# EAGLE board MicroMod_CAN-Bus_Function_Board-Panel (EAGLE 9.6.2), part 1 of 2
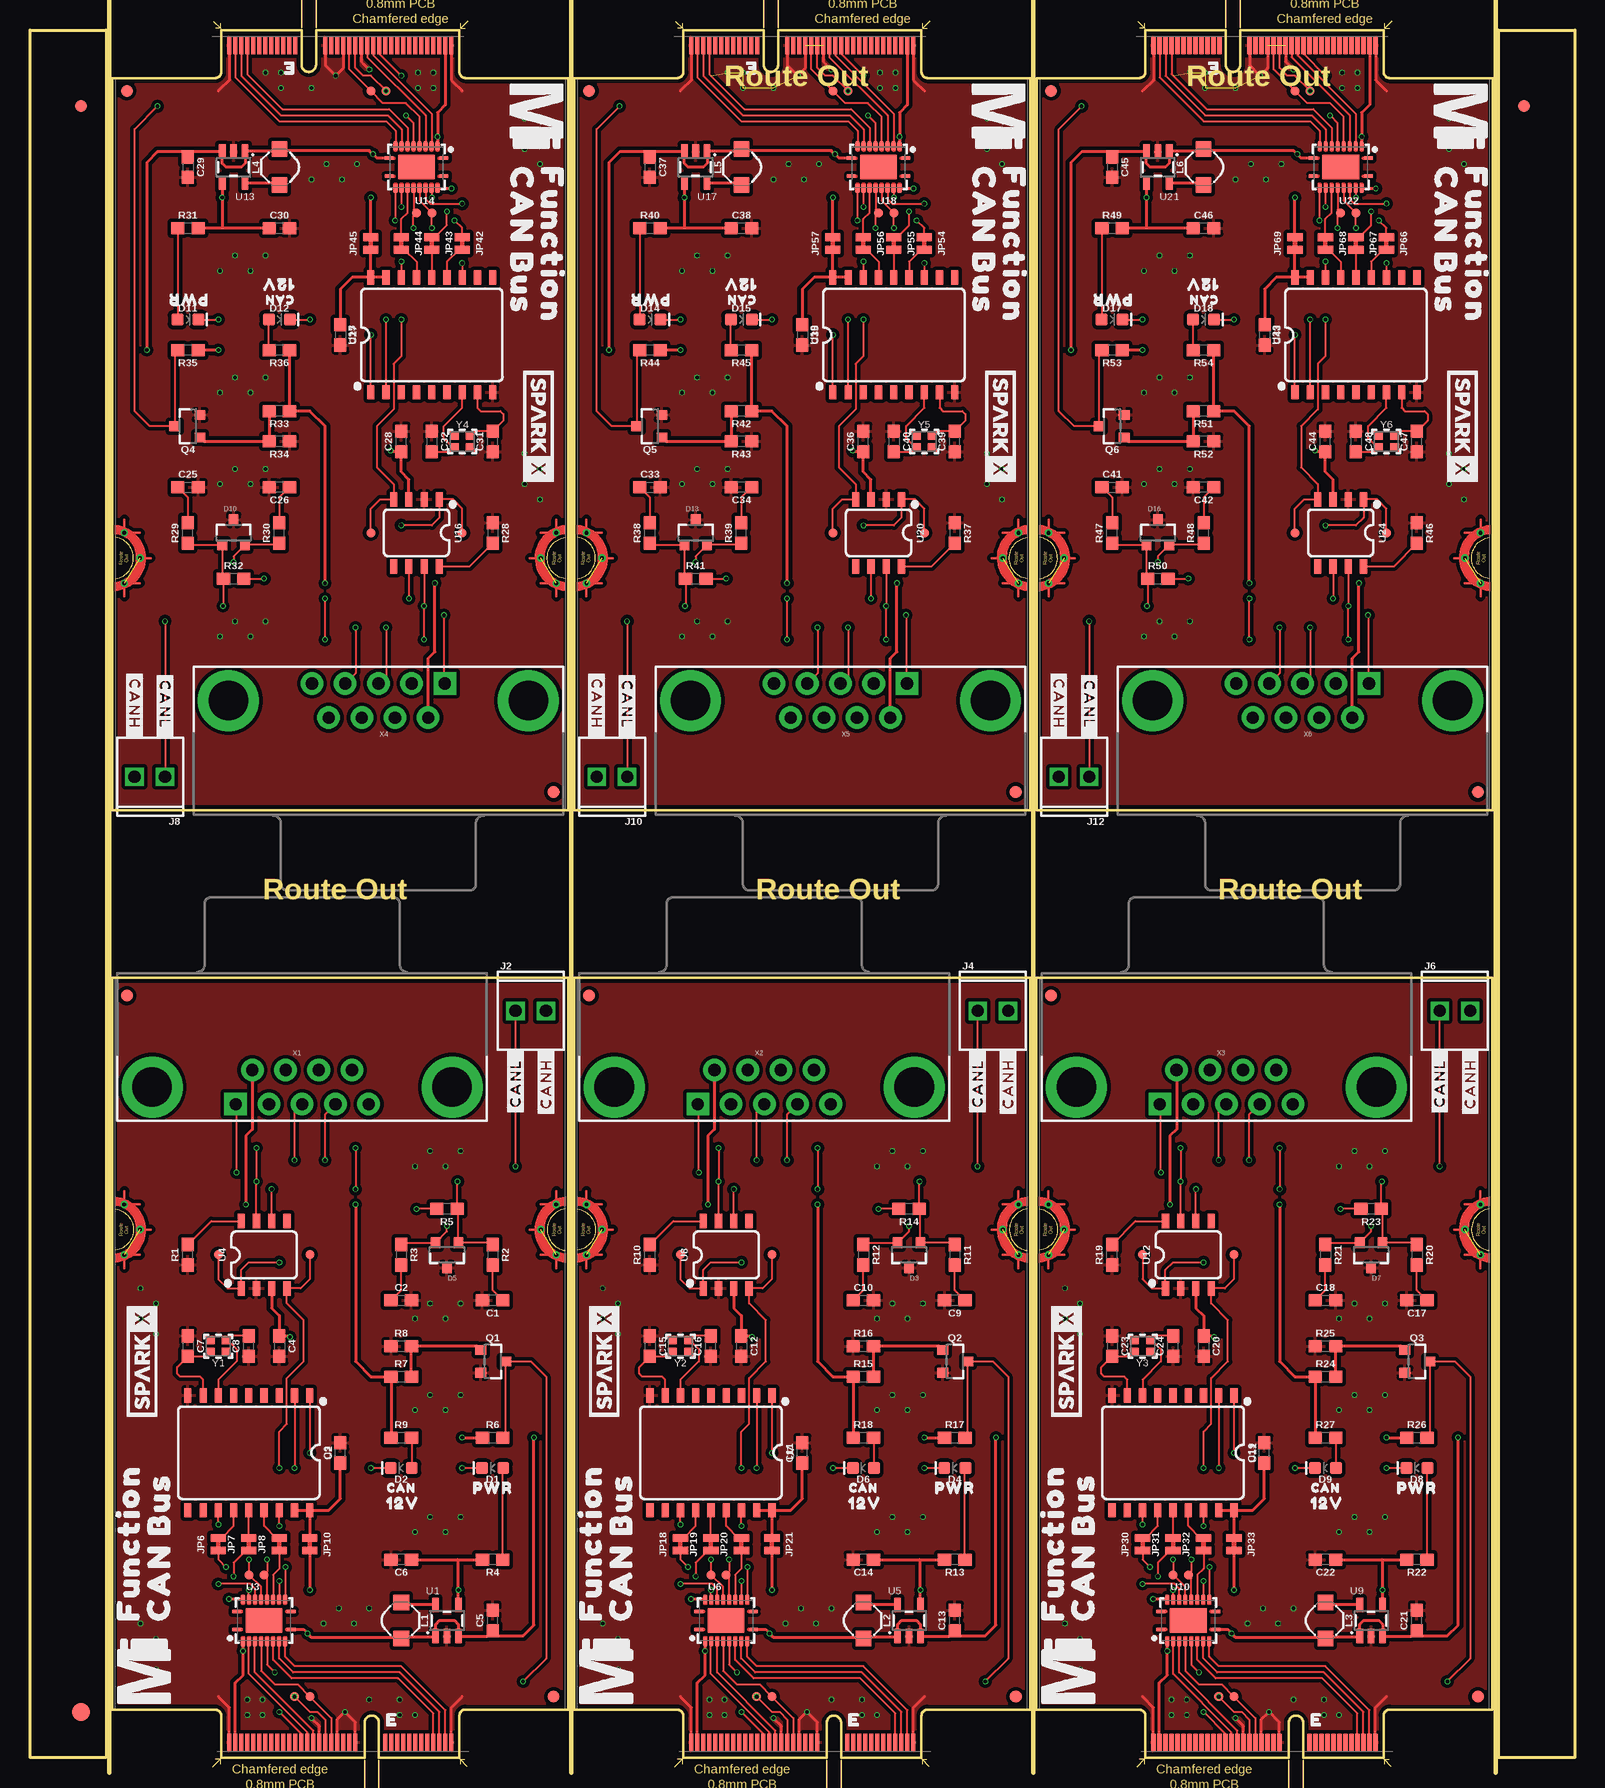
[diagram p0: board, top side]
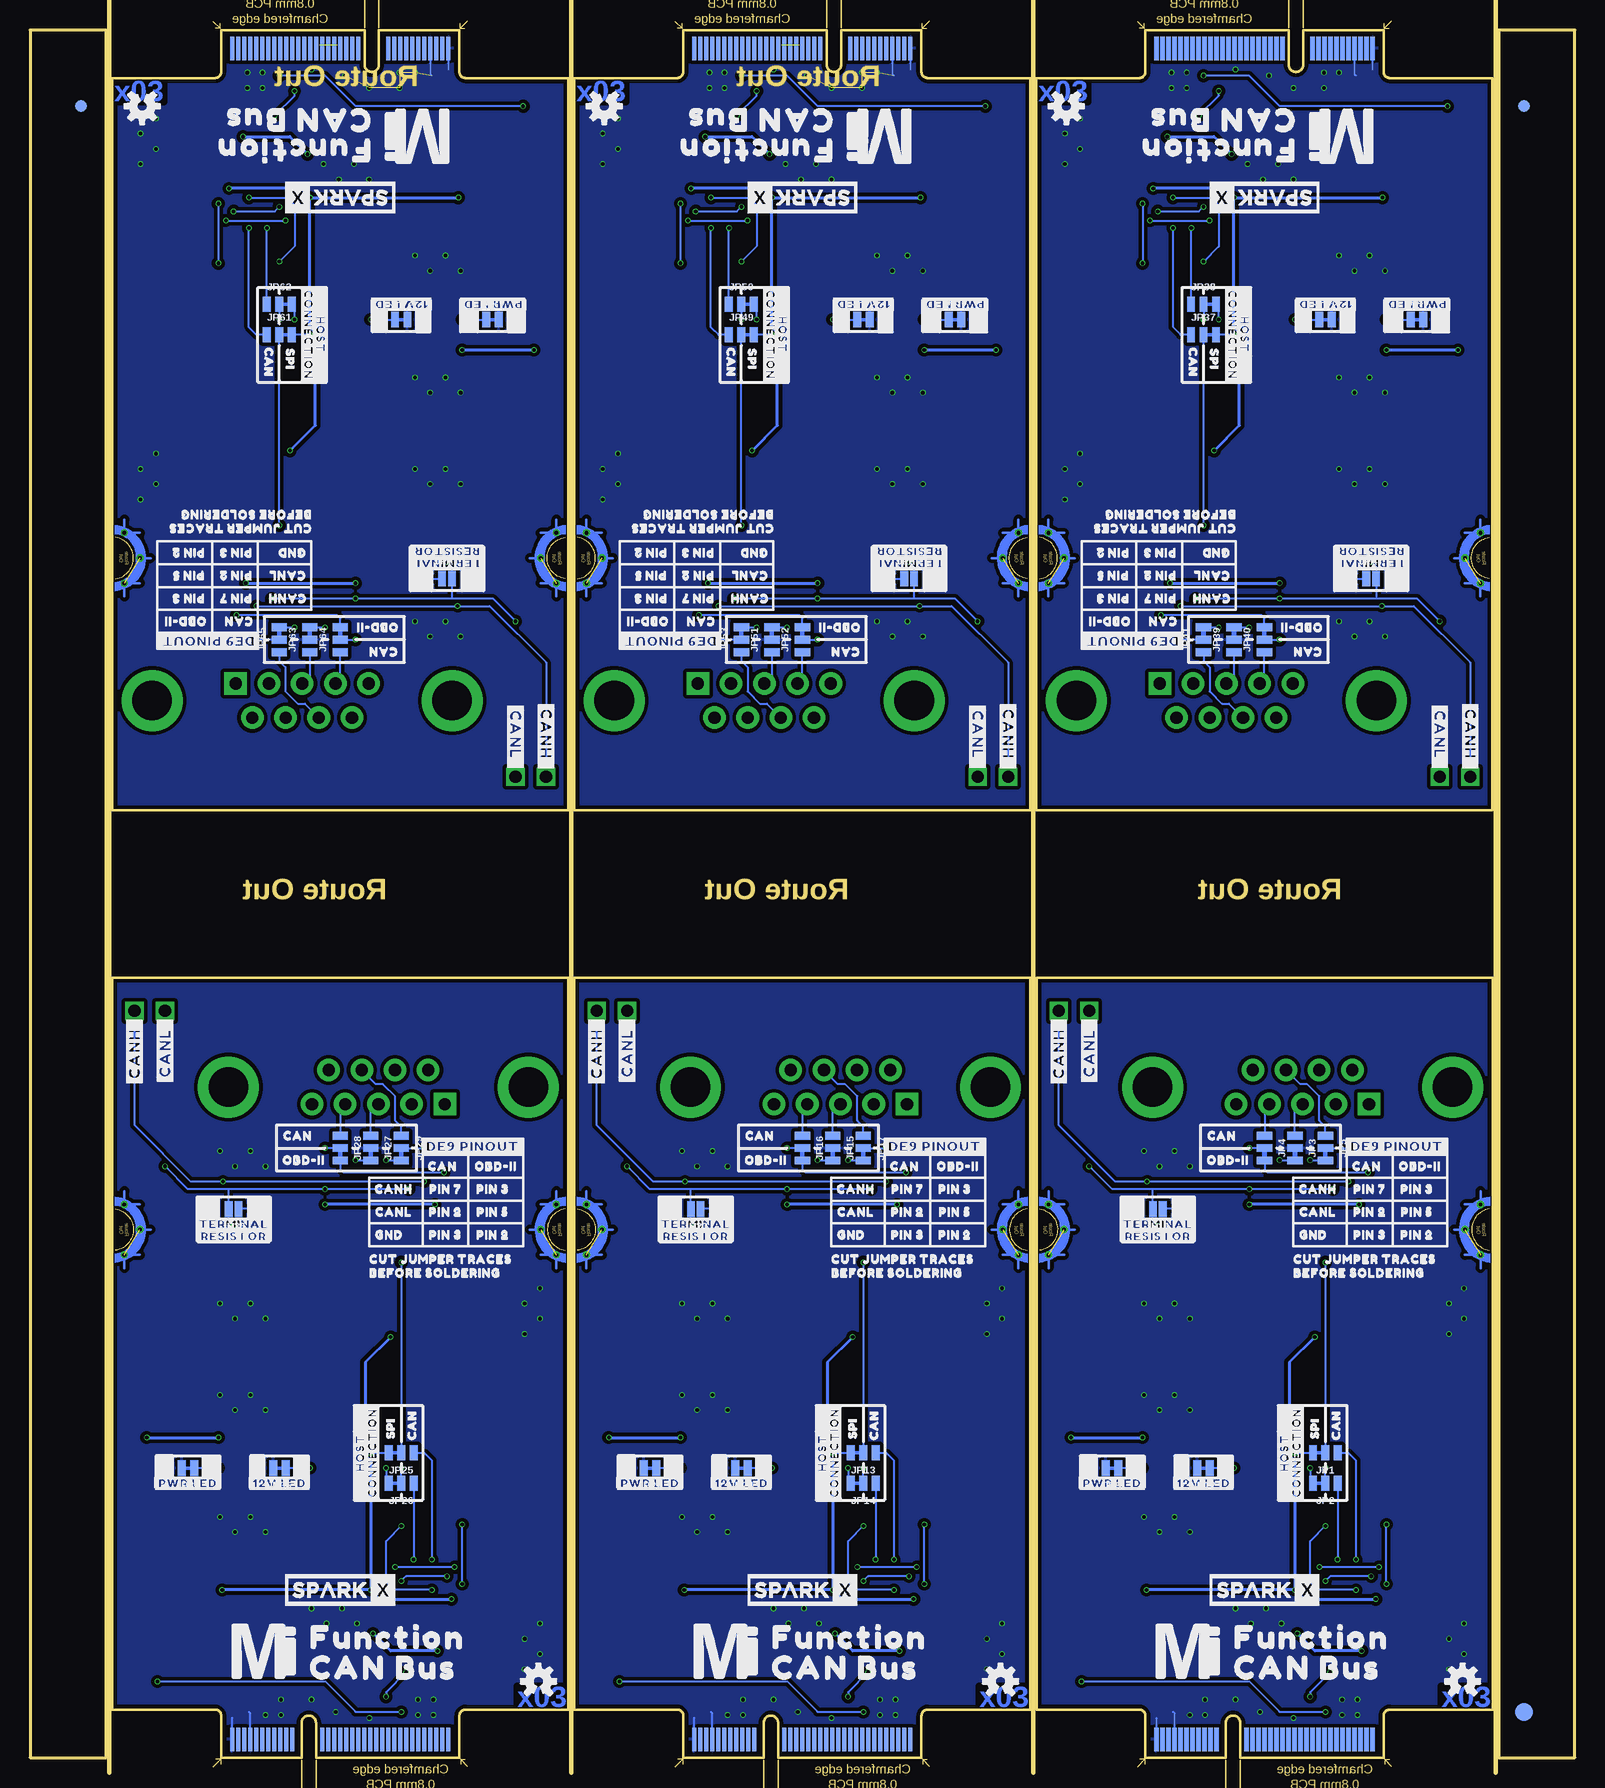
[diagram p1: board, bottom side, seen from below]

Size 128.73 x 143.97 mm. Coordinates in mm from the lower left corner, seen from the top.
Outline: 35.78,0 29.08,0 29.08,2.9 arc180 27.88,2.9 27.88,0 15.93,0 15.93,3.5 arc84 15.46,4 6.86,4 6.86,65 44.86,65 44.86,4 36.26,4 arc85 35.78,3.5 35.78,0
Outline: 74.29,0 67.59,0 67.59,2.9 arc180 66.39,2.9 66.39,0 54.44,0 54.44,3.5 arc84 53.97,4 45.37,4 45.37,65 83.37,65 83.37,4 74.77,4 arc85 74.29,3.5 74.29,0
Outline: 112.8,0 106.1,0 106.1,2.9 arc180 104.9,2.9 104.9,0 92.95,0 92.95,3.5 arc84 92.47,4 83.87,4 83.87,65 121.87,65 121.87,4 113.27,4 arc85 112.8,3.5 112.8,0
Outline: 15.93,143.97 22.63,143.97 22.63,141.07 arc180 23.84,141.07 23.84,143.97 35.78,143.97 35.78,140.47 arc84 36.26,139.97 44.86,139.97 44.86,78.97 6.86,78.97 6.86,139.97 15.46,139.97 arc85 15.93,140.47 15.93,143.97
Outline: 54.44,143.97 61.14,143.97 61.14,141.07 arc180 62.34,141.07 62.34,143.97 74.29,143.97 74.29,140.47 arc84 74.77,139.97 83.37,139.97 83.37,78.97 45.37,78.97 45.37,139.97 53.97,139.97 arc85 54.44,140.47 54.44,143.97
Outline: 92.95,143.97 99.65,143.97 99.65,141.07 arc180 100.85,141.07 100.85,143.97 112.8,143.97 112.8,140.47 arc84 113.28,139.97 121.88,139.97 121.88,78.97 83.88,78.97 83.88,139.97 92.48,139.97 arc85 92.95,140.47 92.95,143.97
Outline: 122.38,143.97 128.73,143.97 128.73,0 122.38,0 122.38,143.97
Outline: 0,143.97 6.35,143.97 6.35,0 0,0 0,143.97
Copper layers (1+2*15+16): Top 0.035mm / dielectric 1.5mm / Route2 0.035mm / dielectric 0.15mm / Route15 0.035mm / dielectric 0.2mm / Bottom 0.035mm
Design rules "MicroMod_CAN-Bus_Function_Board": minimum track width 4mil, minimum drill 0.2mm, track to track 4mil, track to pad 4mil, pad to pad 4mil, via to via 4mil, smd to smd 4mil, copper to edge 6mil, drill to drill 6mil, minimum pad ring 3mil, minimum via ring 3mil, stop-mask expansion 4mil, vias tented up to drill 25mil, thermal gap 10mil
Net classes: 0 default: width 0 mm, drill 0 mm
Milling: 4 lines

## Footprints (pad centres in the part's own frame; a part is rotated, then mirrored left to right if it is on the bottom)
0603 = smd 1.1 x 1: 1 -0.85,0; 2 0.85,0
LED-0603 = smd 1 x 1: A -0.877,0; C 0.877,0
SOT23-3 = smd 0.8 x 0.9: 1 -0.95,-1; 2 0.95,-1; 3 0,1.1
FIDUCIAL-1X2 = smd 1 x 1: 1 0,0
FIDUCIAL-1.5X3 = smd 1.5 x 1.5: 1 0,0
FIDUCIAL-0.2MM = smd 0.2 x 0.2: 1 0,0
M.2-CARD-E-22_FUNCTION_STANDARD = smd 0.35 x 1.45: 1 9.25,1.275; 3 8.75,1.275; 5 8.25,1.275; 7 7.75,1.275; 9 7.25,1.275; 11 6.75,1.275; 13 6.25,1.275; 15 5.75,1.275; 17 5.25,1.275; 19 4.75,1.275; 21 4.25,1.275; 23 3.75,1.275; 33 1.25,1.275; 35 0.75,1.275; 37 0.25,1.275; 39 -0.25,1.275; 41 -0.75,1.275; 43 -1.25,1.275; 45 -1.75,1.275; 47 -2.25,1.275; 49 -2.75,1.275; 51 -3.25,1.275; 53 -3.75,1.275; 55 -4.25,1.275; 57 -4.75,1.275; 59 -5.25,1.275; 61 -5.75,1.275; 63 -6.25,1.275; 65 -6.75,1.275; 67 -7.25,1.275; 69 -7.75,1.275; 71 -8.25,1.275; 73 -8.75,1.275; 75 -9.25,1.275 | smd 0.35 x 1.95 bottom: 2 9,1.525; 4 8.5,1.525; 6 8,1.525; 8 7.5,1.525; 10 7,1.525; 12 6.5,1.525; 14 6,1.525; 16 5.5,1.525; 18 5,1.525; 20 4.5,1.525; 22 4,1.525; 32 1.5,1.525; 34 1,1.525; 36 0.5,1.525; 38 0,1.525; 40 -0.5,1.525; 42 -1,1.525; 44 -1.5,1.525; 46 -2,1.525; 48 -2.5,1.525; 50 -3,1.525; 52 -3.5,1.525; 54 -4,1.525; 56 -4.5,1.525; 58 -5,1.525; 60 -5.5,1.525; 62 -6,1.525; 64 -6.5,1.525; 66 -7,1.525; 68 -7.5,1.525; 70 -8,1.525; 72 -8.5,1.525; 74 -9,1.525 | drill 0.305 pad 0.61: GND1 -18,41.9; GND2 -16.7,44; GND3 -18,46.1; GND4 18,41.9; GND5 16.7,44; GND6 18,46.1
1X02_2.54_SCREWTERM = drill 1.016 square: P1 2.54,0; P2 0,0
SMT-JUMPER_3_1-NC_TRACE_NO-SILK = smd 0.66 x 1.27: 1 -1.041,0; 2 0,0; 3 1.041,0
SMT-JUMPER_2_NC_TRACE_NO-SILK = smd 0.66 x 1.27: 1 -0.521,0; 2 0.521,0
SMT-JUMPER_2_NO_NO-SILK = smd 0.635 x 1.27: 1 -0.406,0; 2 0.406,0
INDUCTOR_4.7UH = smd 1.3 x 1.3: P$1 -1.5,0; P$2 1.5,0
PAD.03X.03 = smd 0.762 x 0.762: 1 0,0
SOT23-5 = smd 0.55 x 1.2: 1 -0.95,-1.3; 2 0,-1.3; 3 0.95,-1.3; 4 0.95,1.3; 5 -0.95,1.3
SO18W = smd 0.6 x 1.2: 1 -5.08,-4.788; 2 -3.81,-4.788; 3 -2.54,-4.788; 4 -1.27,-4.788; 5 0,-4.788; 6 1.27,-4.788; 7 2.54,-4.788; 8 3.81,-4.788; 9 5.08,-4.788; 10 5.08,4.788; 11 3.81,4.788; 12 2.54,4.788; 13 1.27,4.788; 14 0,4.788; 15 -1.27,4.788; 16 -2.54,4.788; 17 -3.81,4.788; 18 -5.08,4.788
VFQFN-20 = smd 0.7 x 0.28: 1 -2.3,-0.75; 10 2.3,-0.75; 11 2.3,0.75; 20 -2.3,0.75 | smd 0.28 x 0.7: 2 -1.75,-1.8; 3 -1.25,-1.8; 4 -0.75,-1.8; 5 -0.25,-1.8; 6 0.25,-1.8; 7 0.75,-1.8; 8 1.25,-1.8; 9 1.75,-1.8; 12 1.75,1.8; 13 1.25,1.8; 14 0.75,1.8; 15 0.25,1.8; 16 -0.25,1.8; 17 -0.75,1.8; 18 -1.25,1.8; 19 -1.75,1.8 | smd 3.05 x 2.05: EPAD 0,0
SO08 = smd 0.6 x 1.2: 1 -1.905,-2.8; 2 -0.635,-2.8; 3 0.635,-2.8; 4 1.905,-2.8; 5 1.905,2.8; 6 0.635,2.8; 7 -0.635,2.8; 8 -1.905,2.8
DB9_MALE = drill 1.016 pad 1.88: 1 5.54,-1.42; 2 2.77,-1.42; 3 0,-1.42; 4 -2.77,-1.42; 6 4.15,1.42; 7 1.38,1.42; 8 -1.38,1.42; 9 -4.15,1.42 | drill 1.016 pad 1.88 square: 5 -5.54,-1.42 | drill 3.302 pad 5.08: G1 -12.5,0; G2 12.5,0
CRYSTAL-SMD-2.0X1.6MM = smd 0.75 x 0.7: 1 -0.675,-0.5; 2 0.675,-0.5; 3 0.675,0.5; 4 -0.675,0.5

## Placement (x,y rotation side)
C1  560pF  [0603]  38.56,38.1 180 top
C2  560pF  [0603]  30.94,38.1 0 top
C3  0.1uF  [0603]  25.86,25.4 90 top
C4  0.1uF  [0603]  20.78,34.29 270 top
C5  4.7uF  [0603]  38.56,11.43 90 top
C6  10uF  [0603]  30.94,16.51 180 top
C7  22pF  [0603]  13.16,34.29 270 top
C8  22pF  [0603]  18.24,34.29 90 top
C9  560pF  [0603]  77.07,38.1 180 top
C10  560pF  [0603]  69.45,38.1 0 top
C11  0.1uF  [0603]  64.37,25.4 90 top
C12  0.1uF  [0603]  59.29,34.29 270 top
C13  4.7uF  [0603]  77.07,11.43 90 top
C14  10uF  [0603]  69.45,16.51 180 top
C15  22pF  [0603]  51.67,34.29 270 top
C16  22pF  [0603]  56.75,34.29 90 top
C17  560pF  [0603]  115.57,38.1 180 top
C18  560pF  [0603]  107.95,38.1 0 top
C19  0.1uF  [0603]  102.87,25.4 90 top
C20  0.1uF  [0603]  97.79,34.29 270 top
C21  4.7uF  [0603]  115.57,11.43 90 top
C22  10uF  [0603]  107.95,16.51 180 top
C23  22pF  [0603]  90.17,34.29 270 top
C24  22pF  [0603]  95.25,34.29 90 top
C25  560pF  [0603]  13.16,105.87 0 top
C26  560pF  [0603]  20.78,105.87 180 top
C27  0.1uF  [0603]  25.86,118.57 270 top
C28  0.1uF  [0603]  30.94,109.68 90 top
C29  4.7uF  [0603]  13.16,132.54 270 top
C30  10uF  [0603]  20.78,127.46 0 top
C31  22pF  [0603]  38.56,109.68 90 top
C32  22pF  [0603]  33.48,109.68 270 top
C33  560pF  [0603]  51.67,105.87 0 top
C34  560pF  [0603]  59.29,105.87 180 top
C35  0.1uF  [0603]  64.37,118.57 270 top
C36  0.1uF  [0603]  69.45,109.68 90 top
C37  4.7uF  [0603]  51.67,132.54 270 top
C38  10uF  [0603]  59.29,127.46 0 top
C39  22pF  [0603]  77.07,109.68 90 top
C40  22pF  [0603]  71.99,109.68 270 top
C41  560pF  [0603]  90.18,105.87 0 top
C42  560pF  [0603]  97.8,105.87 180 top
C43  0.1uF  [0603]  102.88,118.57 270 top
C44  0.1uF  [0603]  107.96,109.68 90 top
C45  4.7uF  [0603]  90.18,132.54 270 top
C46  10uF  [0603]  97.8,127.46 0 top
C47  22pF  [0603]  115.58,109.68 90 top
C48  22pF  [0603]  110.5,109.68 270 top
D1  RED  [LED-0603]  38.56,24.13 180 top
D2  Yellow  [LED-0603]  30.94,24.13 180 top
D3  PESD1CAN  [SOT23-3]  73.26,41.91 180 top
D4  RED  [LED-0603]  77.07,24.13 180 top
D5  PESD1CAN  [SOT23-3]  34.75,41.91 180 top
D6  Yellow  [LED-0603]  69.45,24.13 180 top
D7  PESD1CAN  [SOT23-3]  111.76,41.91 180 top
D8  RED  [LED-0603]  115.57,24.13 180 top
D9  Yellow  [LED-0603]  107.95,24.13 180 top
D10  PESD1CAN  [SOT23-3]  16.97,102.06 0 top
D11  RED  [LED-0603]  13.16,119.84 0 top
D12  Yellow  [LED-0603]  20.78,119.84 0 top
D13  PESD1CAN  [SOT23-3]  55.48,102.06 0 top
D14  RED  [LED-0603]  51.67,119.84 0 top
D15  Yellow  [LED-0603]  59.29,119.84 0 top
D16  PESD1CAN  [SOT23-3]  93.99,102.06 0 top
D17  RED  [LED-0603]  90.18,119.84 0 top
D18  Yellow  [LED-0603]  97.8,119.84 0 top
E$1  [FIDUCIAL-1X2]  4.23,137.62 0 top
E$2  [FIDUCIAL-1X2]  4.23,137.62 0 bottom
E$3  [FIDUCIAL-1X2]  124.5,137.62 0 top
E$4  [FIDUCIAL-1X2]  124.5,137.62 0 bottom
E$5  [FIDUCIAL-1.5X3]  4.23,3.81 0 top
E$6  [FIDUCIAL-1.5X3]  4.23,3.81 0 bottom
FD1  FIDUCIAL1X2  [FIDUCIAL-1X2]  8.08,63.5 0 top
FD2  FIDUCIAL1X2  [FIDUCIAL-1X2]  43.64,5.08 0 top
FD3  FIDUCIAL0.2MM  [FIDUCIAL-0.2MM]  8.08,5.08 0 top
FD4  FIDUCIAL1X2  [FIDUCIAL-1X2]  46.59,63.5 0 top
FD5  FIDUCIAL1X2  [FIDUCIAL-1X2]  82.15,5.08 0 top
FD6  FIDUCIAL0.2MM  [FIDUCIAL-0.2MM]  46.59,5.08 0 top
FD7  FIDUCIAL1X2  [FIDUCIAL-1X2]  85.09,63.5 0 top
FD8  FIDUCIAL1X2  [FIDUCIAL-1X2]  120.65,5.08 0 top
FD9  FIDUCIAL0.2MM  [FIDUCIAL-0.2MM]  85.09,5.08 0 top
FD10  FIDUCIAL1X2  [FIDUCIAL-1X2]  43.64,80.47 180 top
FD11  FIDUCIAL1X2  [FIDUCIAL-1X2]  8.08,138.89 180 top
FD12  FIDUCIAL0.2MM  [FIDUCIAL-0.2MM]  43.64,138.89 180 top
FD13  FIDUCIAL1X2  [FIDUCIAL-1X2]  82.15,80.47 180 top
FD14  FIDUCIAL1X2  [FIDUCIAL-1X2]  46.59,138.89 180 top
FD15  FIDUCIAL0.2MM  [FIDUCIAL-0.2MM]  82.15,138.89 180 top
FD16  FIDUCIAL1X2  [FIDUCIAL-1X2]  120.66,80.47 180 top
FD17  FIDUCIAL1X2  [FIDUCIAL-1X2]  85.1,138.89 180 top
FD18  FIDUCIAL0.2MM  [FIDUCIAL-0.2MM]  120.66,138.89 180 top
J1  MICROMOD_FUNCTION_STANDARD  [M.2-CARD-E-22_FUNCTION_STANDARD]  25.86,0 0 top
J2  [1X02_2.54_SCREWTERM]  40.46,62.23 0 top
J3  MICROMOD_FUNCTION_STANDARD  [M.2-CARD-E-22_FUNCTION_STANDARD]  64.37,0 0 top
J4  [1X02_2.54_SCREWTERM]  78.97,62.23 0 top
J5  MICROMOD_FUNCTION_STANDARD  [M.2-CARD-E-22_FUNCTION_STANDARD]  102.87,0 0 top
J6  [1X02_2.54_SCREWTERM]  117.48,62.23 0 top
J7  MICROMOD_FUNCTION_STANDARD  [M.2-CARD-E-22_FUNCTION_STANDARD]  25.86,143.97 180 top
J8  [1X02_2.54_SCREWTERM]  11.25,81.74 180 top
J9  MICROMOD_FUNCTION_STANDARD  [M.2-CARD-E-22_FUNCTION_STANDARD]  64.37,143.97 180 top
J10  [1X02_2.54_SCREWTERM]  49.76,81.74 180 top
J11  MICROMOD_FUNCTION_STANDARD  [M.2-CARD-E-22_FUNCTION_STANDARD]  102.88,143.97 180 top
J12  [1X02_2.54_SCREWTERM]  88.27,81.74 180 top
JP1  JUMPER-SMT_3_1-NC_TRACE_NO-SILK  [SMT-JUMPER_3_1-NC_TRACE_NO-SILK]  20.78,25.4 180 bottom
JP2  JUMPER-SMT_3_1-NC_TRACE_NO-SILK  [SMT-JUMPER_3_1-NC_TRACE_NO-SILK]  20.78,22.86 180 bottom
JP3  JUMPER-SMT_3_1-NC_TRACE_NO-SILK  [SMT-JUMPER_3_1-NC_TRACE_NO-SILK]  23.32,50.8 270 bottom
JP4  JUMPER-SMT_3_1-NC_TRACE_NO-SILK  [SMT-JUMPER_3_1-NC_TRACE_NO-SILK]  25.86,50.8 270 bottom
JP5  JUMPER-SMT_3_1-NC_TRACE_NO-SILK  [SMT-JUMPER_3_1-NC_TRACE_NO-SILK]  20.78,50.8 270 bottom
JP6  JUMPER-SMT_2_NC_TRACE_NO-SILK  [SMT-JUMPER_2_NC_TRACE_NO-SILK]  15.7,17.78 90 top
JP7  JUMPER-SMT_2_NC_TRACE_NO-SILK  [SMT-JUMPER_2_NC_TRACE_NO-SILK]  18.24,17.78 90 top
JP8  JUMPER-SMT_2_NC_TRACE_NO-SILK  [SMT-JUMPER_2_NC_TRACE_NO-SILK]  20.78,17.78 90 top
JP9  JUMPER-SMT_2_NC_TRACE_NO-SILK  [SMT-JUMPER_2_NC_TRACE_NO-SILK]  38.56,24.13 180 bottom
JP10  JUMPER-SMT_2_NC_TRACE_NO-SILK  [SMT-JUMPER_2_NC_TRACE_NO-SILK]  23.32,17.78 270 top
JP11  JUMPER-SMT_2_NO_NO-SILK  [SMT-JUMPER_2_NO_NO-SILK]  34.75,45.72 180 bottom
JP12  JUMPER-SMT_2_NC_TRACE_NO-SILK  [SMT-JUMPER_2_NC_TRACE_NO-SILK]  30.94,24.13 180 bottom
JP13  JUMPER-SMT_3_1-NC_TRACE_NO-SILK  [SMT-JUMPER_3_1-NC_TRACE_NO-SILK]  59.29,25.4 180 bottom
JP14  JUMPER-SMT_3_1-NC_TRACE_NO-SILK  [SMT-JUMPER_3_1-NC_TRACE_NO-SILK]  59.29,22.86 180 bottom
JP15  JUMPER-SMT_3_1-NC_TRACE_NO-SILK  [SMT-JUMPER_3_1-NC_TRACE_NO-SILK]  61.83,50.8 270 bottom
JP16  JUMPER-SMT_3_1-NC_TRACE_NO-SILK  [SMT-JUMPER_3_1-NC_TRACE_NO-SILK]  64.37,50.8 270 bottom
JP17  JUMPER-SMT_3_1-NC_TRACE_NO-SILK  [SMT-JUMPER_3_1-NC_TRACE_NO-SILK]  59.29,50.8 270 bottom
JP18  JUMPER-SMT_2_NC_TRACE_NO-SILK  [SMT-JUMPER_2_NC_TRACE_NO-SILK]  54.21,17.78 90 top
JP19  JUMPER-SMT_2_NC_TRACE_NO-SILK  [SMT-JUMPER_2_NC_TRACE_NO-SILK]  56.75,17.78 90 top
JP20  JUMPER-SMT_2_NC_TRACE_NO-SILK  [SMT-JUMPER_2_NC_TRACE_NO-SILK]  59.29,17.78 90 top
JP21  JUMPER-SMT_2_NC_TRACE_NO-SILK  [SMT-JUMPER_2_NC_TRACE_NO-SILK]  61.83,17.78 270 top
JP22  JUMPER-SMT_2_NC_TRACE_NO-SILK  [SMT-JUMPER_2_NC_TRACE_NO-SILK]  77.07,24.13 180 bottom
JP23  JUMPER-SMT_2_NO_NO-SILK  [SMT-JUMPER_2_NO_NO-SILK]  73.26,45.72 180 bottom
JP24  JUMPER-SMT_2_NC_TRACE_NO-SILK  [SMT-JUMPER_2_NC_TRACE_NO-SILK]  69.45,24.13 180 bottom
JP25  JUMPER-SMT_3_1-NC_TRACE_NO-SILK  [SMT-JUMPER_3_1-NC_TRACE_NO-SILK]  97.79,25.4 180 bottom
JP26  JUMPER-SMT_3_1-NC_TRACE_NO-SILK  [SMT-JUMPER_3_1-NC_TRACE_NO-SILK]  97.79,22.86 180 bottom
JP27  JUMPER-SMT_3_1-NC_TRACE_NO-SILK  [SMT-JUMPER_3_1-NC_TRACE_NO-SILK]  100.33,50.8 270 bottom
JP28  JUMPER-SMT_3_1-NC_TRACE_NO-SILK  [SMT-JUMPER_3_1-NC_TRACE_NO-SILK]  102.87,50.8 270 bottom
JP29  JUMPER-SMT_3_1-NC_TRACE_NO-SILK  [SMT-JUMPER_3_1-NC_TRACE_NO-SILK]  97.79,50.8 270 bottom
JP30  JUMPER-SMT_2_NC_TRACE_NO-SILK  [SMT-JUMPER_2_NC_TRACE_NO-SILK]  92.71,17.78 90 top
JP31  JUMPER-SMT_2_NC_TRACE_NO-SILK  [SMT-JUMPER_2_NC_TRACE_NO-SILK]  95.25,17.78 90 top
JP32  JUMPER-SMT_2_NC_TRACE_NO-SILK  [SMT-JUMPER_2_NC_TRACE_NO-SILK]  97.79,17.78 90 top
JP33  JUMPER-SMT_2_NC_TRACE_NO-SILK  [SMT-JUMPER_2_NC_TRACE_NO-SILK]  100.33,17.78 270 top
JP34  JUMPER-SMT_2_NC_TRACE_NO-SILK  [SMT-JUMPER_2_NC_TRACE_NO-SILK]  115.57,24.13 180 bottom
JP35  JUMPER-SMT_2_NO_NO-SILK  [SMT-JUMPER_2_NO_NO-SILK]  111.76,45.72 180 bottom
JP36  JUMPER-SMT_2_NC_TRACE_NO-SILK  [SMT-JUMPER_2_NC_TRACE_NO-SILK]  107.95,24.13 180 bottom
JP37  JUMPER-SMT_3_1-NC_TRACE_NO-SILK  [SMT-JUMPER_3_1-NC_TRACE_NO-SILK]  30.94,118.57 0 bottom
JP38  JUMPER-SMT_3_1-NC_TRACE_NO-SILK  [SMT-JUMPER_3_1-NC_TRACE_NO-SILK]  30.94,121.11 0 bottom
JP39  JUMPER-SMT_3_1-NC_TRACE_NO-SILK  [SMT-JUMPER_3_1-NC_TRACE_NO-SILK]  28.4,93.17 90 bottom
JP40  JUMPER-SMT_3_1-NC_TRACE_NO-SILK  [SMT-JUMPER_3_1-NC_TRACE_NO-SILK]  25.86,93.17 90 bottom
JP41  JUMPER-SMT_3_1-NC_TRACE_NO-SILK  [SMT-JUMPER_3_1-NC_TRACE_NO-SILK]  30.94,93.17 90 bottom
JP42  JUMPER-SMT_2_NC_TRACE_NO-SILK  [SMT-JUMPER_2_NC_TRACE_NO-SILK]  36.02,126.19 270 top
JP43  JUMPER-SMT_2_NC_TRACE_NO-SILK  [SMT-JUMPER_2_NC_TRACE_NO-SILK]  33.48,126.19 270 top
JP44  JUMPER-SMT_2_NC_TRACE_NO-SILK  [SMT-JUMPER_2_NC_TRACE_NO-SILK]  30.94,126.19 270 top
JP45  JUMPER-SMT_2_NC_TRACE_NO-SILK  [SMT-JUMPER_2_NC_TRACE_NO-SILK]  28.4,126.19 90 top
JP46  JUMPER-SMT_2_NC_TRACE_NO-SILK  [SMT-JUMPER_2_NC_TRACE_NO-SILK]  13.16,119.84 0 bottom
JP47  JUMPER-SMT_2_NO_NO-SILK  [SMT-JUMPER_2_NO_NO-SILK]  16.97,98.25 0 bottom
JP48  JUMPER-SMT_2_NC_TRACE_NO-SILK  [SMT-JUMPER_2_NC_TRACE_NO-SILK]  20.78,119.84 0 bottom
JP49  JUMPER-SMT_3_1-NC_TRACE_NO-SILK  [SMT-JUMPER_3_1-NC_TRACE_NO-SILK]  69.45,118.57 0 bottom
JP50  JUMPER-SMT_3_1-NC_TRACE_NO-SILK  [SMT-JUMPER_3_1-NC_TRACE_NO-SILK]  69.45,121.11 0 bottom
JP51  JUMPER-SMT_3_1-NC_TRACE_NO-SILK  [SMT-JUMPER_3_1-NC_TRACE_NO-SILK]  66.91,93.17 90 bottom
JP52  JUMPER-SMT_3_1-NC_TRACE_NO-SILK  [SMT-JUMPER_3_1-NC_TRACE_NO-SILK]  64.37,93.17 90 bottom
JP53  JUMPER-SMT_3_1-NC_TRACE_NO-SILK  [SMT-JUMPER_3_1-NC_TRACE_NO-SILK]  69.45,93.17 90 bottom
JP54  JUMPER-SMT_2_NC_TRACE_NO-SILK  [SMT-JUMPER_2_NC_TRACE_NO-SILK]  74.53,126.19 270 top
JP55  JUMPER-SMT_2_NC_TRACE_NO-SILK  [SMT-JUMPER_2_NC_TRACE_NO-SILK]  71.99,126.19 270 top
JP56  JUMPER-SMT_2_NC_TRACE_NO-SILK  [SMT-JUMPER_2_NC_TRACE_NO-SILK]  69.45,126.19 270 top
JP57  JUMPER-SMT_2_NC_TRACE_NO-SILK  [SMT-JUMPER_2_NC_TRACE_NO-SILK]  66.91,126.19 90 top
JP58  JUMPER-SMT_2_NC_TRACE_NO-SILK  [SMT-JUMPER_2_NC_TRACE_NO-SILK]  51.67,119.84 0 bottom
JP59  JUMPER-SMT_2_NO_NO-SILK  [SMT-JUMPER_2_NO_NO-SILK]  55.48,98.25 0 bottom
JP60  JUMPER-SMT_2_NC_TRACE_NO-SILK  [SMT-JUMPER_2_NC_TRACE_NO-SILK]  59.29,119.84 0 bottom
JP61  JUMPER-SMT_3_1-NC_TRACE_NO-SILK  [SMT-JUMPER_3_1-NC_TRACE_NO-SILK]  107.96,118.57 0 bottom
JP62  JUMPER-SMT_3_1-NC_TRACE_NO-SILK  [SMT-JUMPER_3_1-NC_TRACE_NO-SILK]  107.96,121.11 0 bottom
JP63  JUMPER-SMT_3_1-NC_TRACE_NO-SILK  [SMT-JUMPER_3_1-NC_TRACE_NO-SILK]  105.42,93.17 90 bottom
JP64  JUMPER-SMT_3_1-NC_TRACE_NO-SILK  [SMT-JUMPER_3_1-NC_TRACE_NO-SILK]  102.88,93.17 90 bottom
JP65  JUMPER-SMT_3_1-NC_TRACE_NO-SILK  [SMT-JUMPER_3_1-NC_TRACE_NO-SILK]  107.96,93.17 90 bottom
JP66  JUMPER-SMT_2_NC_TRACE_NO-SILK  [SMT-JUMPER_2_NC_TRACE_NO-SILK]  113.04,126.19 270 top
JP67  JUMPER-SMT_2_NC_TRACE_NO-SILK  [SMT-JUMPER_2_NC_TRACE_NO-SILK]  110.5,126.19 270 top
JP68  JUMPER-SMT_2_NC_TRACE_NO-SILK  [SMT-JUMPER_2_NC_TRACE_NO-SILK]  107.96,126.19 270 top
JP69  JUMPER-SMT_2_NC_TRACE_NO-SILK  [SMT-JUMPER_2_NC_TRACE_NO-SILK]  105.42,126.19 90 top
JP70  JUMPER-SMT_2_NC_TRACE_NO-SILK  [SMT-JUMPER_2_NC_TRACE_NO-SILK]  90.18,119.84 0 bottom
JP71  JUMPER-SMT_2_NO_NO-SILK  [SMT-JUMPER_2_NO_NO-SILK]  93.99,98.25 0 bottom
JP72  JUMPER-SMT_2_NC_TRACE_NO-SILK  [SMT-JUMPER_2_NC_TRACE_NO-SILK]  97.8,119.84 0 bottom
L1  4.7µH/±30%/1.2A  [INDUCTOR_4.7UH]  30.94,11.43 270 top
L2  4.7µH/±30%/1.2A  [INDUCTOR_4.7UH]  69.45,11.43 270 top
L3  4.7µH/±30%/1.2A  [INDUCTOR_4.7UH]  107.95,11.43 270 top
L4  4.7µH/±30%/1.2A  [INDUCTOR_4.7UH]  20.78,132.54 90 top
L5  4.7µH/±30%/1.2A  [INDUCTOR_4.7UH]  59.29,132.54 90 top
L6  4.7µH/±30%/1.2A  [INDUCTOR_4.7UH]  97.8,132.54 90 top
Q1  220mA/50V/3.5Ω  [SOT23-3]  38.56,33.02 270 top
Q2  220mA/50V/3.5Ω  [SOT23-3]  77.07,33.02 270 top
Q3  220mA/50V/3.5Ω  [SOT23-3]  115.57,33.02 270 top
Q4  220mA/50V/3.5Ω  [SOT23-3]  13.16,110.95 90 top
Q5  220mA/50V/3.5Ω  [SOT23-3]  51.67,110.95 90 top
Q6  220mA/50V/3.5Ω  [SOT23-3]  90.18,110.95 90 top
R1  4.7k  [0603]  13.16,41.91 90 top
R2  100  [0603]  38.56,41.91 270 top
R3  100  [0603]  30.94,41.91 270 top
R4  1k  [0603]  38.56,16.51 180 top
R5  120OHM  [0603]  34.75,45.72 180 top
R6  10k  [0603]  38.56,26.67 0 top
R7  10k  [0603]  30.94,31.75 0 top
R8  100k  [0603]  30.94,34.29 0 top
R9  10k  [0603]  30.94,26.67 0 top
R10  4.7k  [0603]  51.67,41.91 90 top
R11  100  [0603]  77.07,41.91 270 top
R12  100  [0603]  69.45,41.91 270 top
R13  1k  [0603]  77.07,16.51 180 top
R14  120OHM  [0603]  73.26,45.72 180 top
R15  10k  [0603]  69.45,31.75 0 top
R16  100k  [0603]  69.45,34.29 0 top
R17  10k  [0603]  77.07,26.67 0 top
R18  10k  [0603]  69.45,26.67 0 top
R19  4.7k  [0603]  90.17,41.91 90 top
R20  100  [0603]  115.57,41.91 270 top
R21  100  [0603]  107.95,41.91 270 top
R22  1k  [0603]  115.57,16.51 180 top
R23  120OHM  [0603]  111.76,45.72 180 top
R24  10k  [0603]  107.95,31.75 0 top
R25  100k  [0603]  107.95,34.29 0 top
R26  10k  [0603]  115.57,26.67 0 top
R27  10k  [0603]  107.95,26.67 0 top
R28  4.7k  [0603]  38.56,102.06 270 top
R29  100  [0603]  13.16,102.06 90 top
R30  100  [0603]  20.78,102.06 90 top
R31  1k  [0603]  13.16,127.46 0 top
R32  120OHM  [0603]  16.97,98.25 0 top
R33  10k  [0603]  20.78,112.22 180 top
R34  100k  [0603]  20.78,109.68 180 top
R35  10k  [0603]  13.16,117.3 180 top
R36  10k  [0603]  20.78,117.3 180 top
R37  4.7k  [0603]  77.07,102.06 270 top
R38  100  [0603]  51.67,102.06 90 top
R39  100  [0603]  59.29,102.06 90 top
R40  1k  [0603]  51.67,127.46 0 top
R41  120OHM  [0603]  55.48,98.25 0 top
R42  10k  [0603]  59.29,112.22 180 top
R43  100k  [0603]  59.29,109.68 180 top
R44  10k  [0603]  51.67,117.3 180 top
R45  10k  [0603]  59.29,117.3 180 top
R46  4.7k  [0603]  115.58,102.06 270 top
R47  100  [0603]  90.18,102.06 90 top
R48  100  [0603]  97.8,102.06 90 top
R49  1k  [0603]  90.18,127.46 0 top
R50  120OHM  [0603]  93.99,98.25 0 top
R51  10k  [0603]  97.8,112.22 180 top
R52  100k  [0603]  97.8,109.68 180 top
R53  10k  [0603]  90.18,117.3 180 top
R54  10k  [0603]  97.8,117.3 180 top
TP1  TEST-POINT3  [PAD.03X.03]  22.05,5.08 0 top
TP2  TEST-POINT3  [PAD.03X.03]  23.32,5.08 0 top
TP3  TEST-POINT3  [PAD.03X.03]  19.51,15.24 0 top
TP4  TEST-POINT3  [PAD.03X.03]  18.24,15.24 0 top
TP5  TEST-POINT3  [PAD.03X.03]  23.32,41.91 180 top
TP6  TEST-POINT3  [PAD.03X.03]  15.7,41.91 180 top
TP7  TEST-POINT3  [PAD.03X.03]  60.56,5.08 0 top
TP8  TEST-POINT3  [PAD.03X.03]  61.83,5.08 0 top
TP9  TEST-POINT3  [PAD.03X.03]  58.02,15.24 0 top
TP10  TEST-POINT3  [PAD.03X.03]  56.75,15.24 0 top
TP11  TEST-POINT3  [PAD.03X.03]  61.83,41.91 180 top
TP12  TEST-POINT3  [PAD.03X.03]  54.21,41.91 180 top
TP13  TEST-POINT3  [PAD.03X.03]  99.06,5.08 0 top
TP14  TEST-POINT3  [PAD.03X.03]  100.33,5.08 0 top
TP15  TEST-POINT3  [PAD.03X.03]  96.52,15.24 0 top
TP16  TEST-POINT3  [PAD.03X.03]  95.25,15.24 0 top
TP17  TEST-POINT3  [PAD.03X.03]  100.33,41.91 180 top
TP18  TEST-POINT3  [PAD.03X.03]  92.71,41.91 180 top
TP19  TEST-POINT3  [PAD.03X.03]  29.67,138.89 180 top
TP20  TEST-POINT3  [PAD.03X.03]  28.4,138.89 180 top
TP21  TEST-POINT3  [PAD.03X.03]  32.21,128.73 180 top
TP22  TEST-POINT3  [PAD.03X.03]  33.48,128.73 180 top
TP23  TEST-POINT3  [PAD.03X.03]  28.4,102.06 0 top
TP24  TEST-POINT3  [PAD.03X.03]  36.02,102.06 0 top
TP25  TEST-POINT3  [PAD.03X.03]  68.18,138.89 180 top
TP26  TEST-POINT3  [PAD.03X.03]  66.91,138.89 180 top
TP27  TEST-POINT3  [PAD.03X.03]  70.72,128.73 180 top
TP28  TEST-POINT3  [PAD.03X.03]  71.99,128.73 180 top
TP29  TEST-POINT3  [PAD.03X.03]  66.91,102.06 0 top
TP30  TEST-POINT3  [PAD.03X.03]  74.53,102.06 0 top
TP31  TEST-POINT3  [PAD.03X.03]  106.69,138.89 180 top
TP32  TEST-POINT3  [PAD.03X.03]  105.42,138.89 180 top
TP33  TEST-POINT3  [PAD.03X.03]  109.23,128.73 180 top
TP34  TEST-POINT3  [PAD.03X.03]  110.5,128.73 180 top
TP35  TEST-POINT3  [PAD.03X.03]  105.42,102.06 0 top
TP36  TEST-POINT3  [PAD.03X.03]  113.04,102.06 0 top
U1  XC9140  [SOT23-5]  34.75,11.43 0 top
U2  MCP2515  [SO18W]  18.24,25.4 180 top
U3  TXS0108  [VFQFN-20]  19.51,11.43 0 top
U4  MCP2551  [SO08]  19.51,41.91 0 top
U5  XC9140  [SOT23-5]  73.26,11.43 0 top
U6  TXS0108  [VFQFN-20]  58.02,11.43 0 top
U7  MCP2515  [SO18W]  56.75,25.4 180 top
U8  MCP2551  [SO08]  58.02,41.91 0 top
U9  XC9140  [SOT23-5]  111.76,11.43 0 top
U10  TXS0108  [VFQFN-20]  96.52,11.43 0 top
U11  MCP2515  [SO18W]  95.25,25.4 180 top
U12  MCP2551  [SO08]  96.52,41.91 0 top
U13  XC9140  [SOT23-5]  16.97,132.54 180 top
U14  TXS0108  [VFQFN-20]  32.21,132.54 180 top
U15  MCP2515  [SO18W]  33.48,118.57 0 top
U16  MCP2551  [SO08]  32.21,102.06 180 top
U17  XC9140  [SOT23-5]  55.48,132.54 180 top
U18  TXS0108  [VFQFN-20]  70.72,132.54 180 top
U19  MCP2515  [SO18W]  71.99,118.57 0 top
U20  MCP2551  [SO08]  70.72,102.06 180 top
U21  XC9140  [SOT23-5]  93.99,132.54 180 top
U22  TXS0108  [VFQFN-20]  109.23,132.54 180 top
U23  MCP2515  [SO18W]  110.5,118.57 0 top
U24  MCP2551  [SO08]  109.23,102.06 180 top
U$1  [MICROMOD_MI_LOGO_1]  9.47,7.24 90 top
U$2  [FUNCTION0]  8.2,10.03 90 top
U$3  [CAN_BUS0]  10.74,10.03 90 top
U$4  [SPARKX-MEDIUM]  9.35,33.02 90 top
U$5  [#CANH_#0]  43,53.34 90 top
U$6  [#CANL_#0]  40.46,53.47 90 top
U$7  [PWR0]  38.56,22.48 0 top
U$8  [CAN0]  30.94,22.48 0 top
U$9  [12V0]  31.06,21.21 0 top
U$10  [#TERMINAL#0]  34.75,44.45 0 bottom
U$11  [#RESISTOR#0]  34.75,43.43 0 bottom
U$12  [#PWR_LED#0]  38.56,22.86 0 bottom
U$13  [#12V_LED#0]  30.94,22.86 0 bottom
U$14  [CUT_JUMPER_TRACES0]  23.95,41.53 0 bottom
U$15  [#DE9_PINOUT#0]  14.81,50.93 0 bottom
U$16  [BEFORE_SOLDERING0]  23.95,40.39 0 bottom
U$17  [GND0]  21.79,43.56 0 bottom
U$18  [CAN0]  17.35,49.28 0 bottom
U$19  [OBD#II0]  12.9,49.28 0 bottom
U$20  [PIN_70]  17.09,47.37 0 bottom
U$21  [PIN_20]  17.09,45.47 0 bottom
U$22  [PIN_20]  13.16,43.56 0 bottom
U$23  [PIN_30]  13.16,47.37 0 bottom
U$24  [PIN_30]  17.09,43.56 0 bottom
U$25  [PIN_50]  13.16,45.47 0 bottom
U$26  [OBD#II0]  28.91,49.78 0 bottom
U$27  [CAN0]  29.41,51.82 0 bottom
U$28  [CAN0]  19.89,27.69 90 bottom
U$29  [SPI0]  21.67,27.43 90 bottom
U$30  [#CANL_#0]  40.46,56.01 90 bottom
U$31  [#CANH_#0]  43,55.88 90 bottom
U$32  [CANH0]  21.41,47.37 0 bottom
U$33  [CANL0]  21.41,45.47 0 bottom
U$34  [#HOST#0]  24.21,25.4 90 bottom
U$35  [#CONNECTION#0]  23.19,25.4 90 bottom
U$36  [MICROMOD_MI_LOGO_1]  32.21,8.89 0 bottom
U$37  [CAN_BUS0]  29.79,7.49 0 bottom
U$38  [FUNCTION0]  29.79,10.03 0 bottom
U$39  [SPARKX-MEDIUM]  25.86,13.97 0 bottom
U$40  [OSHW-LOGO-S]  9.35,6.35 0 bottom
U$41  [MICROMOD_MI_LOGO_1]  47.98,7.24 90 top
U$42  [FUNCTION0]  46.71,10.03 90 top
U$43  [CAN_BUS0]  49.25,10.03 90 top
U$44  [GND0]  60.3,43.56 0 bottom
U$45  [OBD#II0]  51.41,49.28 0 bottom
U$46  [PIN_70]  55.6,47.37 0 bottom
U$47  [PIN_20]  55.6,45.47 0 bottom
U$48  [PIN_20]  51.67,43.56 0 bottom
U$49  [PIN_30]  51.67,47.37 0 bottom
U$50  [PIN_30]  55.6,43.56 0 bottom
U$51  [PIN_50]  51.67,45.47 0 bottom
U$52  [#CANH_#0]  81.51,53.34 90 top
U$53  [#CANL_#0]  78.97,53.47 90 top
U$54  [PWR0]  77.07,22.48 0 top
U$55  [CAN0]  69.45,22.48 0 top
U$56  [12V0]  69.57,21.21 0 top
U$57  [#TERMINAL#0]  73.26,44.45 0 bottom
U$58  [#RESISTOR#0]  73.26,43.43 0 bottom
U$59  [#PWR_LED#0]  77.07,22.86 0 bottom
U$60  [#12V_LED#0]  69.45,22.86 0 bottom
U$61  [OBD#II0]  67.41,49.78 0 bottom
U$62  [CAN0]  67.92,51.82 0 bottom
U$63  [CAN0]  58.4,27.69 90 bottom
U$64  [SPI0]  60.18,27.43 90 bottom
U$65  [#CANL_#0]  78.97,56.01 90 bottom
U$66  [#CANH_#0]  81.51,55.88 90 bottom
U$67  [CAN0]  55.86,49.28 0 bottom
U$68  [CANH0]  59.92,47.37 0 bottom
U$69  [CANL0]  59.92,45.47 0 bottom
U$70  [#DE9_PINOUT#0]  53.32,50.93 0 bottom
U$71  [CUT_JUMPER_TRACES0]  62.46,41.53 0 bottom
U$72  [BEFORE_SOLDERING0]  62.46,40.39 0 bottom
U$73  [#HOST#0]  62.72,25.4 90 bottom
U$74  [#CONNECTION#0]  61.7,25.4 90 bottom
U$75  [MICROMOD_MI_LOGO_1]  70.72,8.89 0 bottom
U$76  [CAN_BUS0]  68.3,7.49 0 bottom
U$77  [FUNCTION0]  68.3,10.03 0 bottom
U$78  [OSHW-LOGO-S]  47.86,6.35 0 bottom
U$79  [SPARKX-MEDIUM]  47.86,33.02 90 top
U$80  [SPARKX-MEDIUM]  64.37,13.97 0 bottom
U$81  [MICROMOD_MI_LOGO_1]  86.49,7.24 90 top
U$82  [FUNCTION0]  85.22,10.03 90 top
U$83  [CAN_BUS0]  87.76,10.03 90 top
U$84  [GND0]  98.81,43.56 0 bottom
U$85  [OBD#II0]  89.92,49.28 0 bottom
U$86  [PIN_70]  94.11,47.37 0 bottom
U$87  [PIN_20]  94.11,45.47 0 bottom
U$88  [PIN_20]  90.17,43.56 0 bottom
U$89  [PIN_30]  90.17,47.37 0 bottom
U$90  [PIN_30]  94.11,43.56 0 bottom
U$91  [PIN_50]  90.17,45.47 0 bottom
U$92  [#CANH_#0]  120.02,53.34 90 top
U$93  [#CANL_#0]  117.48,53.47 90 top
U$94  [PWR0]  115.57,22.48 0 top
U$95  [CAN0]  107.95,22.48 0 top
U$96  [12V0]  108.08,21.21 0 top
U$97  [#TERMINAL#0]  111.76,44.45 0 bottom
U$98  [#RESISTOR#0]  111.76,43.43 0 bottom
U$99  [#PWR_LED#0]  115.57,22.86 0 bottom
U$100  [#12V_LED#0]  107.95,22.86 0 bottom
U$101  [OBD#II0]  105.92,49.78 0 bottom
U$102  [CAN0]  106.43,51.82 0 bottom
U$103  [CAN0]  96.9,27.69 90 bottom
U$104  [SPI0]  98.68,27.43 90 bottom
U$105  [#CANL_#0]  117.48,56.01 90 bottom
U$106  [#CANH_#0]  120.02,55.88 90 bottom
U$107  [CAN0]  94.36,49.28 0 bottom
U$108  [CANH0]  98.43,47.37 0 bottom
U$109  [CANL0]  98.43,45.47 0 bottom
U$110  [#DE9_PINOUT#0]  91.82,50.93 0 bottom
U$111  [CUT_JUMPER_TRACES0]  100.97,41.53 0 bottom
U$112  [BEFORE_SOLDERING0]  100.97,40.39 0 bottom
U$113  [#HOST#0]  101.22,25.4 90 bottom
U$114  [#CONNECTION#0]  100.21,25.4 90 bottom
U$115  [MICROMOD_MI_LOGO_1]  109.22,8.89 0 bottom
U$116  [CAN_BUS0]  106.81,7.49 0 bottom
U$117  [FUNCTION0]  106.81,10.03 0 bottom
U$118  [OSHW-LOGO-S]  86.36,6.35 0 bottom
U$119  [SPARKX-MEDIUM]  86.36,33.02 90 top
U$120  [SPARKX-MEDIUM]  102.87,13.97 0 bottom
U$121  [MICROMOD_MI_LOGO_1]  42.24,136.73 270 top
U$122  [FUNCTION0]  43.51,133.94 270 top
U$123  [CAN_BUS0]  40.97,133.94 270 top
U$124  [GND0]  29.92,100.41 180 bottom
U$125  [OBD#II0]  38.81,94.69 180 bottom
U$126  [PIN_70]  34.62,96.6 180 bottom
U$127  [PIN_20]  34.62,98.5 180 bottom
U$128  [PIN_20]  38.56,100.41 180 bottom
U$129  [PIN_30]  38.56,96.6 180 bottom
U$130  [PIN_30]  34.62,100.41 180 bottom
U$131  [PIN_50]  38.56,98.5 180 bottom
U$132  [#CANH_#0]  8.71,90.63 270 top
U$133  [#CANL_#0]  11.25,90.5 270 top
U$134  [PWR0]  13.16,121.49 180 top
U$135  [CAN0]  20.78,121.49 180 top
U$136  [12V0]  20.65,122.76 180 top
U$137  [#TERMINAL#0]  16.97,99.52 180 bottom
U$138  [#RESISTOR#0]  16.97,100.54 180 bottom
U$139  [#PWR_LED#0]  13.16,121.11 180 bottom
U$140  [#12V_LED#0]  20.78,121.11 180 bottom
U$141  [OBD#II0]  22.81,94.19 180 bottom
U$142  [CAN0]  22.3,92.15 180 bottom
U$143  [CAN0]  31.83,116.28 270 bottom
U$144  [SPI0]  30.05,116.54 270 bottom
U$145  [#CANL_#0]  11.25,87.96 270 bottom
U$146  [#CANH_#0]  8.71,88.09 270 bottom
U$147  [CAN0]  34.37,94.69 180 bottom
U$148  [CANH0]  30.3,96.6 180 bottom
U$149  [CANL0]  30.3,98.5 180 bottom
U$150  [#DE9_PINOUT#0]  36.91,93.04 180 bottom
U$151  [CUT_JUMPER_TRACES0]  27.76,102.44 180 bottom
U$152  [BEFORE_SOLDERING0]  27.76,103.58 180 bottom
U$153  [#HOST#0]  27.51,118.57 270 bottom
U$154  [#CONNECTION#0]  28.53,118.57 270 bottom
U$155  [MICROMOD_MI_LOGO_1]  19.51,135.08 180 bottom
U$156  [CAN_BUS0]  21.92,136.48 180 bottom
U$157  [FUNCTION0]  21.92,133.94 180 bottom
U$158  [OSHW-LOGO-S]  42.37,137.62 180 bottom
U$159  [SPARKX-MEDIUM]  42.37,110.95 270 top
U$160  [SPARKX-MEDIUM]  25.86,130 180 bottom
U$161  [MICROMOD_MI_LOGO_1]  80.75,136.73 270 top
U$162  [FUNCTION0]  82.02,133.94 270 top
U$163  [CAN_BUS0]  79.48,133.94 270 top
U$164  [GND0]  68.43,100.41 180 bottom
U$165  [OBD#II0]  77.32,94.69 180 bottom
U$166  [PIN_70]  73.13,96.6 180 bottom
U$167  [PIN_20]  73.13,98.5 180 bottom
U$168  [PIN_20]  77.07,100.41 180 bottom
U$169  [PIN_30]  77.07,96.6 180 bottom
U$170  [PIN_30]  73.13,100.41 180 bottom
U$171  [PIN_50]  77.07,98.5 180 bottom
U$172  [#CANH_#0]  47.22,90.63 270 top
U$173  [#CANL_#0]  49.76,90.5 270 top
U$174  [PWR0]  51.67,121.49 180 top
U$175  [CAN0]  59.29,121.49 180 top
U$176  [12V0]  59.16,122.76 180 top
U$177  [#TERMINAL#0]  55.48,99.52 180 bottom
U$178  [#RESISTOR#0]  55.48,100.54 180 bottom
U$179  [#PWR_LED#0]  51.67,121.11 180 bottom
U$180  [#12V_LED#0]  59.29,121.11 180 bottom
U$181  [OBD#II0]  61.32,94.19 180 bottom
U$182  [CAN0]  60.81,92.15 180 bottom
U$183  [CAN0]  70.34,116.28 270 bottom
U$184  [SPI0]  68.56,116.54 270 bottom
U$185  [#CANL_#0]  49.76,87.96 270 bottom
U$186  [#CANH_#0]  47.22,88.09 270 bottom
U$187  [CAN0]  72.88,94.69 180 bottom
U$188  [CANH0]  68.81,96.6 180 bottom
U$189  [CANL0]  68.81,98.5 180 bottom
U$190  [#DE9_PINOUT#0]  75.42,93.04 180 bottom
U$191  [CUT_JUMPER_TRACES0]  66.27,102.44 180 bottom
U$192  [BEFORE_SOLDERING0]  66.27,103.58 180 bottom
U$193  [#HOST#0]  66.02,118.57 270 bottom
U$194  [#CONNECTION#0]  67.03,118.57 270 bottom
U$195  [MICROMOD_MI_LOGO_1]  58.02,135.08 180 bottom
U$196  [CAN_BUS0]  60.43,136.48 180 bottom
U$197  [FUNCTION0]  60.43,133.94 180 bottom
U$198  [OSHW-LOGO-S]  80.88,137.62 180 bottom
U$199  [SPARKX-MEDIUM]  80.88,110.95 270 top
U$200  [SPARKX-MEDIUM]  64.37,130 180 bottom
U$201  [MICROMOD_MI_LOGO_1]  119.26,136.73 270 top
U$202  [FUNCTION0]  120.53,133.94 270 top
U$203  [CAN_BUS0]  117.99,133.94 270 top
U$204  [GND0]  106.94,100.41 180 bottom
U$205  [OBD#II0]  115.83,94.69 180 bottom
U$206  [PIN_70]  111.64,96.6 180 bottom
U$207  [PIN_20]  111.64,98.5 180 bottom
U$208  [PIN_20]  115.58,100.41 180 bottom
U$209  [PIN_30]  115.58,96.6 180 bottom
U$210  [PIN_30]  111.64,100.41 180 bottom
U$211  [PIN_50]  115.58,98.5 180 bottom
U$212  [#CANH_#0]  85.73,90.63 270 top
U$213  [#CANL_#0]  88.27,90.5 270 top
U$214  [PWR0]  90.18,121.49 180 top
U$215  [CAN0]  97.8,121.49 180 top
U$216  [12V0]  97.67,122.76 180 top
U$217  [#TERMINAL#0]  93.99,99.52 180 bottom
U$218  [#RESISTOR#0]  93.99,100.54 180 bottom
U$219  [#PWR_LED#0]  90.18,121.11 180 bottom
U$220  [#12V_LED#0]  97.8,121.11 180 bottom
U$221  [OBD#II0]  99.83,94.19 180 bottom
U$222  [CAN0]  99.32,92.15 180 bottom
U$223  [CAN0]  108.84,116.28 270 bottom
U$224  [SPI0]  107.07,116.54 270 bottom
U$225  [#CANL_#0]  88.27,87.96 270 bottom
U$226  [#CANH_#0]  85.73,88.09 270 bottom
U$227  [CAN0]  111.38,94.69 180 bottom
U$228  [CANH0]  107.32,96.6 180 bottom
U$229  [CANL0]  107.32,98.5 180 bottom
U$230  [#DE9_PINOUT#0]  113.92,93.04 180 bottom
U$231  [CUT_JUMPER_TRACES0]  104.78,102.44 180 bottom
U$232  [BEFORE_SOLDERING0]  104.78,103.58 180 bottom
U$233  [#HOST#0]  104.53,118.57 270 bottom
U$234  [#CONNECTION#0]  105.54,118.57 270 bottom
U$235  [MICROMOD_MI_LOGO_1]  96.53,135.08 180 bottom
U$236  [CAN_BUS0]  98.94,136.48 180 bottom
U$237  [FUNCTION0]  98.94,133.94 180 bottom
U$238  [OSHW-LOGO-S]  119.39,137.62 180 bottom
U$239  [SPARKX-MEDIUM]  119.39,110.95 270 top
U$240  [SPARKX-MEDIUM]  102.88,130 180 bottom
X1  DB9 Plug  [DB9_MALE]  22.68,55.88 0 top
X2  DB9 Plug  [DB9_MALE]  61.19,55.88 0 top
X3  DB9 Plug  [DB9_MALE]  99.7,55.88 0 top
X4  DB9 Plug  [DB9_MALE]  29.03,88.09 180 top
X5  DB9 Plug  [DB9_MALE]  67.54,88.09 180 top
X6  DB9 Plug  [DB9_MALE]  106.05,88.09 180 top
Y1  16MHz  [CRYSTAL-SMD-2.0X1.6MM]  15.7,34.29 180 top
Y2  16MHz  [CRYSTAL-SMD-2.0X1.6MM]  54.21,34.29 180 top
Y3  16MHz  [CRYSTAL-SMD-2.0X1.6MM]  92.71,34.29 180 top
Y4  16MHz  [CRYSTAL-SMD-2.0X1.6MM]  36.02,109.68 0 top
Y5  16MHz  [CRYSTAL-SMD-2.0X1.6MM]  74.53,109.68 0 top
Y6  16MHz  [CRYSTAL-SMD-2.0X1.6MM]  113.04,109.68 0 top

## Library data of the parts
C1 C2 C9 C10 C17 C18 C25 C26 C33 C34 C41 C42 = SparkFun-Capacitors; PROD_ID: CAP-08749
C3 C4 C11 C12 C19 C20 C27 C28 C35 C36 C43 C44 = SparkFun-Capacitors; PROD_ID: CAP-00810
C5 C13 C21 C29 C37 C45 = SparkFun-Capacitors; PROD_ID: CAP-08280
C6 C14 C22 C30 C38 C46 = SparkFun-Capacitors; PROD_ID: CAP-11015
C7 C8 C15 C16 C23 C24 C31 C32 C39 C40 C47 C48 = SparkFun-Capacitors; PROD_ID: CAP-07876
D1 D4 D8 D11 D14 D17 = SparkFun-LED; PROD_ID: DIO-00819
D2 D6 D9 D12 D15 D18 = SparkFun-LED; PROD_ID: DIO-09003
D3 D5 D7 D10 D13 D16 = SparkFun-DiscreteSemi; PROD_ID: DIO-12501
E$1-E$4 FD1-FD18 U$40 U$78 U$118 U$158 U$198 U$238 = SparkFun-Aesthetics
E$5 E$6 = SparkFun-Retired
J1 J3 J5 J7 J9 J11 U$1 U$36 U$41 U$75 U$81 U$115 U$121 U$155 U$161 U$195 U$201 U$235 = SparkFun-MicroMod
J2 J4 J6 J8 J10 J12 TP1-TP36 = SparkFun-Connectors
JP1-JP72 = SparkFun-Jumpers
L1-L6 = SparkFun-Coils; PROD_ID: NDUC-10146
Q1-Q6 = SparkFun-DiscreteSemi; PROD_ID: TRANS-00830
R1 R10 R19 R28 R37 R46 = SparkFun-Resistors; PROD_ID: RES-07857
R2 R3 R11 R12 R20 R21 R29 R30 R38 R39 R47 R48 = SparkFun-Resistors; PROD_ID: RES-07863
R4 R13 R22 R31 R40 R49 = SparkFun-Resistors; PROD_ID: RES-07856
R5 R14 R23 R32 R41 R50 = SparkFun-Resistors
R6 R7 R9 R15 R17 R18 R24 R26 R27 R33 R35 R36 R42 R44 R45 R51 R53 R54 = SparkFun-Resistors; PROD_ID: RES-00824
R8 R16 R25 R34 R43 R52 = SparkFun-Resistors; PROD_ID: RES-07828
U1 U5 U9 U13 U17 U21 = SparkFun-IC-Power
U2 U7 U11 U15 U19 U23 = SparkFun-IC-Comms; PROD_ID: IC-09906
U3 U6 U10 U14 U18 U22 = SparkFun-IC-Comms; PROD_ID: IC-14343
U4 U8 U12 U16 U20 U24 = SparkFun-IC-Comms; PROD_ID: IC-09907
U$2 U$3 U$5-U$35 U$37 U$38 U$42-U$74 U$76 U$77 U$82-U$114 U$116 U$117 U$122-U$154 U$156 U$157 U$162-U$194 U$196 U$197 U$202-U$234 U$236 U$237 = output
U$4 U$39 U$79 U$80 U$119 U$120 U$159 U$160 U$199 U$200 U$239 U$240 = SparkX
X1-X6 = SparkFun-Connectors; PROD_ID: CONN-09904
Y1-Y6 = SparkFun-Clocks; PROD_ID: XTAL-14681

## Nets
3.3V: C5.1 J1.73 L1.P$2 R6.1 U1.1 U1.3 U3.2 U3.10
3.3V1: C13.1 J3.73 L2.P$2 R17.1 U5.1 U5.3 U6.2 U6.10
3.3V2: C21.1 J5.73 L3.P$2 R26.1 U9.1 U9.3 U10.2 U10.10
3.3V3: C29.1 J7.73 L4.P$2 R35.1 U13.1 U13.3 U14.2 U14.10
3.3V4: C37.1 J9.73 L5.P$2 R44.1 U17.1 U17.3 U18.2 U18.10
3.3V5: C45.1 J11.73 L6.P$2 R53.1 U21.1 U21.3 U22.2 U22.10
5V: C4.1 C6.1 JP10.2 R4.2 U1.4 U3.19 U4.3
5V1: C12.1 C14.1 JP21.2 R13.2 U5.4 U6.19 U8.3
5V2: C20.1 C22.1 JP33.2 R22.2 U9.4 U10.19 U12.3
5V3: C28.1 C30.1 JP45.2 R31.2 U13.4 U14.19 U16.3
5V4: C36.1 C38.1 JP57.2 R40.2 U17.4 U18.19 U20.3
5V5: C44.1 C46.1 JP69.2 R49.2 U21.4 U22.19 U24.3
12V: R7.1 R9.1 X1.9
12V1: R15.1 R18.1 X2.9
12V2: R24.1 R27.1 X3.9
12V3: R33.1 R36.1 X4.9
12V4: R42.1 R45.1 X5.9
12V5: R51.1 R54.1 X6.9
2515_CS: U2.16 U3.18
2515_CS1: U6.18 U7.16
2515_CS2: U10.18 U11.16
2515_CS3: U14.18 U15.16
2515_CS4: U18.18 U19.16
2515_CS5: U22.18 U23.16
2515_INT: U2.12 U3.17
2515_INT1: U6.17 U7.12
2515_INT2: U10.17 U11.12
2515_INT3: U14.17 U15.12
2515_INT4: U18.17 U19.12
2515_INT5: U22.17 U23.12
2515_RXCAN: JP2.3 U2.2
2515_RXCAN1: JP14.3 U7.2
2515_RXCAN2: JP26.3 U11.2
2515_RXCAN3: JP38.3 U15.2
2515_RXCAN4: JP50.3 U19.2
2515_RXCAN5: JP62.3 U23.2
2515_SCK: JP6.2 U2.13
2515_SCK1: JP18.2 U7.13
2515_SCK2: JP30.2 U11.13
2515_SCK3: JP42.2 U15.13
2515_SCK4: JP54.2 U19.13
2515_SCK5: JP66.2 U23.13
2515_SDI: JP7.2 U2.14
2515_SDI1: JP19.2 U7.14
2515_SDI2: JP31.2 U11.14
2515_SDI3: JP43.2 U15.14
2515_SDI4: JP55.2 U19.14
2515_SDI5: JP67.2 U23.14
2515_SDO: JP8.2 U2.15
2515_SDO1: JP20.2 U7.15
2515_SDO2: JP32.2 U11.15
2515_SDO3: JP44.2 U15.15
2515_SDO4: JP56.2 U19.15
2515_SDO5: JP68.2 U23.15
2515_TXCAN: JP1.3 U2.1
2515_TXCAN1: JP13.3 U7.1
2515_TXCAN2: JP25.3 U11.1
2515_TXCAN3: JP37.3 U15.1
2515_TXCAN4: JP49.3 U19.1
2515_TXCAN5: JP61.3 U23.1
2515_VCC: C3.1 JP10.1 U2.17 U2.18
2515_VCC1: C11.1 JP21.1 U7.17 U7.18
2515_VCC2: C19.1 JP33.1 U11.17 U11.18
2515_VCC3: C27.1 JP45.1 U15.17 U15.18
2515_VCC4: C35.1 JP57.1 U19.17 U19.18
2515_VCC5: C43.1 JP69.1 U23.17 U23.18
CANH: D5.1 J2.P1 JP5.2 R2.1 R5.1 U4.7
CANH1: D3.1 J4.P1 JP17.2 R11.1 R14.1 U8.7
CANH2: D7.1 J6.P1 JP29.2 R20.1 R23.1 U12.7
CANH3: D10.1 J8.P1 JP41.2 R29.1 R32.1 U16.7
CANH4: D13.1 J10.P1 JP53.2 R38.1 R41.1 U20.7
CANH5: D16.1 J12.P1 JP65.2 R47.1 R50.1 U24.7
CANL: D5.2 J2.P2 JP4.2 JP11.2 R3.1 U4.6
CANL1: D3.2 J4.P2 JP16.2 JP23.2 R12.1 U8.6
CANL2: D7.2 J6.P2 JP28.2 JP35.2 R21.1 U12.6
CANL3: D10.2 J8.P2 JP40.2 JP47.2 R30.1 U16.6
CANL4: D13.2 J10.P2 JP52.2 JP59.2 R39.1 U20.6
CANL5: D16.2 J12.P2 JP64.2 JP71.2 R48.1 U24.6
DE9_PIN1: JP15.3 JP16.1 X2.2
DE9_PIN2: JP3.3 JP4.1 X1.2
DE9_PIN3: JP3.1 JP5.3 X1.3
DE9_PIN4: JP15.1 JP17.3 X2.3
DE9_PIN5: JP4.3 X1.5
DE9_PIN6: JP16.3 X2.5
DE9_PIN7: JP5.1 X1.7
DE9_PIN8: JP17.1 X2.7
DE9_PIN9: JP27.3 JP28.1 X3.2
DE9_PIN10: JP27.1 JP29.3 X3.3
DE9_PIN11: JP28.3 X3.5
DE9_PIN12: JP29.1 X3.7
DE9_PIN13: JP39.3 JP40.1 X4.2
DE9_PIN14: JP39.1 JP41.3 X4.3
DE9_PIN15: JP40.3 X4.5
DE9_PIN16: JP41.1 X4.7
DE9_PIN17: JP51.3 JP52.1 X5.2
DE9_PIN18: JP51.1 JP53.3 X5.3
DE9_PIN19: JP52.3 X5.5
DE9_PIN20: JP53.1 X5.7
DE9_PIN21: JP63.3 JP64.1 X6.2
DE9_PIN22: JP63.1 JP65.3 X6.3
DE9_PIN23: JP64.3 X6.5
DE9_PIN24: JP65.1 X6.7
GND: C1.2 C2.2 C3.2 C4.2 C5.2 C6.2 C7.1 C8.1 D5.3 J1.1 J1.2 J1.8 J1.33 J1.39 J1.45 J1.75 J1.GND1 J1.GND2 J1.GND3 J1.GND4 J1.GND5 J1.GND6 JP3.2 JP9.2 JP12.2 Q1.2 R1.1 R8.1 U1.2 U2.9 U3.11 U4.2
GND1: C9.2 C10.2 C11.2 C12.2 C13.2 C14.2 C15.1 C16.1 D3.3 J3.1 J3.2 J3.8 J3.33 J3.39 J3.45 J3.75 J3.GND1 J3.GND2 J3.GND3 J3.GND4 J3.GND5 J3.GND6 JP15.2 JP22.2 JP24.2 Q2.2 R10.1 R16.1 U5.2 U6.11 U7.9 U8.2
GND2: C17.2 C18.2 C19.2 C20.2 C21.2 C22.2 C23.1 C24.1 D7.3 J5.1 J5.2 J5.8 J5.33 J5.39 J5.45 J5.75 J5.GND1 J5.GND2 J5.GND3 J5.GND4 J5.GND5 J5.GND6 JP27.2 JP34.2 JP36.2 Q3.2 R19.1 R25.1 U9.2 U10.11 U11.9 U12.2
GND3: C25.2 C26.2 C27.2 C28.2 C29.2 C30.2 C31.1 C32.1 D10.3 J7.1 J7.2 J7.8 J7.33 J7.39 J7.45 J7.75 J7.GND1 J7.GND2 J7.GND3 J7.GND4 J7.GND5 J7.GND6 JP39.2 JP46.2 JP48.2 Q4.2 R28.1 R34.1 U13.2 U14.11 U15.9 U16.2
GND4: C33.2 C34.2 C35.2 C36.2 C37.2 C38.2 C39.1 C40.1 D13.3 J9.1 J9.2 J9.8 J9.33 J9.39 J9.45 J9.75 J9.GND1 J9.GND2 J9.GND3 J9.GND4 J9.GND5 J9.GND6 JP51.2 JP58.2 JP60.2 Q5.2 R37.1 R43.1 U17.2 U18.11 U19.9 U20.2
GND5: C41.2 C42.2 C43.2 C44.2 C45.2 C46.2 C47.1 C48.1 D16.3 J11.1 J11.2 J11.8 J11.33 J11.39 J11.45 J11.75 J11.GND1 J11.GND2 J11.GND3 J11.GND4 J11.GND5 J11.GND6 JP63.2 JP70.2 JP72.2 Q6.2 R46.1 R52.1 U21.2 U22.11 U23.9 U24.2
MM_CS: J1.49 U3.3
MM_CS1: J3.49 U6.3
MM_CS2: J5.49 U10.3
MM_CS3: J7.49 U14.3
MM_CS4: J9.49 U18.3
MM_CS5: J11.49 U22.3
MM_F1: J3.51 Q2.3 R17.2
MM_F2: J1.51 Q1.3 R6.2
MM_F3: J5.51 Q3.3 R26.2
MM_F4: J7.51 Q4.3 R35.2
MM_F5: J9.51 Q5.3 R44.2
MM_F6: J11.51 Q6.3 R53.2
MM_INT: J1.47 U3.4
MM_INT1: J3.47 U6.4
MM_INT2: J5.47 U10.4
MM_INT3: J7.47 U14.4
MM_INT4: J9.47 U18.4
MM_INT5: J11.47 U22.4
MM_RXCAN: J1.43 TP1.1 U3.6
MM_RXCAN1: J3.43 TP7.1 U6.6
MM_RXCAN2: J5.43 TP13.1 U10.6
MM_RXCAN3: J7.43 TP19.1 U14.6
MM_RXCAN4: J9.43 TP25.1 U18.6
MM_RXCAN5: J11.43 TP31.1 U22.6
MM_SCK: J1.3 U3.9
MM_SCK1: J3.3 U6.9
MM_SCK2: J5.3 U10.9
MM_SCK3: J7.3 U14.9
MM_SCK4: J9.3 U18.9
MM_SCK5: J11.3 U22.9
MM_SDI: J1.5 U3.8
MM_SDI1: J3.5 U6.8
MM_SDI2: J5.5 U10.8
MM_SDI3: J7.5 U14.8
MM_SDI4: J9.5 U18.8
MM_SDI5: J11.5 U22.8
MM_SDO: J1.7 U3.7
MM_SDO1: J3.7 U6.7
MM_SDO2: J5.7 U10.7
MM_SDO3: J7.7 U14.7
MM_SDO4: J9.7 U18.7
MM_SDO5: J11.7 U22.7
MM_TXCAN: J1.41 TP2.1 U3.5
MM_TXCAN1: J3.41 TP8.1 U6.5
MM_TXCAN2: J5.41 TP14.1 U10.5
MM_TXCAN3: J7.41 TP20.1 U14.5
MM_TXCAN4: J9.41 TP26.1 U18.5
MM_TXCAN5: J11.41 TP32.1 U22.5
N$1: C1.1 R2.2
N$2: C2.1 R3.2
N$3: C7.2 U2.8 Y1.3
N$4: L1.P$1 U1.5
N$5: C8.2 U2.7 Y1.1
N$6: JP11.1 R5.2
N$7: D1.C JP9.1
N$8: D1.A R4.1
N$9: R1.2 U4.8
N$10: Q1.1 R7.2 R8.2
N$11: D2.A R9.2
N$12: D2.C JP12.1
N$13: U3.EPAD
N$14: R10.2 U8.8
N$15: C9.1 R11.2
N$16: C10.1 R12.2
N$17: L2.P$1 U5.5
N$18: C15.2 U7.8 Y2.3
N$19: C16.2 U7.7 Y2.1
N$20: D4.C JP22.1
N$21: D4.A R13.1
N$22: JP23.1 R14.2
N$23: Q2.1 R15.2 R16.2
N$24: D6.A R18.2
N$25: D6.C JP24.1
N$26: U6.EPAD
N$27: R19.2 U12.8
N$28: C17.1 R20.2
N$29: C18.1 R21.2
N$30: L3.P$1 U9.5
N$31: C23.2 U11.8 Y3.3
N$32: C24.2 U11.7 Y3.1
N$33: D8.C JP34.1
N$34: D8.A R22.1
N$35: JP35.1 R23.2
N$36: Q3.1 R24.2 R25.2
N$37: D9.A R27.2
N$38: D9.C JP36.1
N$39: U10.EPAD
N$40: R28.2 U16.8
N$41: C25.1 R29.2
N$42: C26.1 R30.2
N$43: L4.P$1 U13.5
N$44: C31.2 U15.8 Y4.3
N$45: C32.2 U15.7 Y4.1
N$46: D11.C JP46.1
N$47: D11.A R31.1
N$48: JP47.1 R32.2
N$49: Q4.1 R33.2 R34.2
N$50: D12.A R36.2
N$51: D12.C JP48.1
N$52: U14.EPAD
N$53: R37.2 U20.8
N$54: C33.1 R38.2
N$55: C34.1 R39.2
N$56: L5.P$1 U17.5
N$57: C39.2 U19.8 Y5.3
N$58: C40.2 U19.7 Y5.1
N$59: D14.C JP58.1
N$60: D14.A R40.1
N$61: JP59.1 R41.2
N$62: Q5.1 R42.2 R43.2
N$63: D15.A R45.2
N$64: D15.C JP60.1
N$65: U18.EPAD
N$66: R46.2 U24.8
N$67: C41.1 R47.2
N$68: C42.1 R48.2
N$69: L6.P$1 U21.5
N$70: C47.2 U23.8 Y6.3
N$71: C48.2 U23.7 Y6.1
N$72: D17.C JP70.1
N$73: D17.A R49.1
N$74: JP71.1 R50.2
N$75: Q6.1 R51.2 R52.2
N$76: D18.A R54.2
N$77: D18.C JP72.1
N$78: U22.EPAD
RXCAN: JP2.2 TP5.1 U4.4
RXCAN1: JP14.2 TP11.1 U8.4
RXCAN2: JP26.2 TP17.1 U12.4
RXCAN3: JP38.2 TP23.1 U16.4
RXCAN4: JP50.2 TP29.1 U20.4
RXCAN5: JP62.2 TP35.1 U24.4
SCK: JP6.1 U3.12
SCK1: JP18.1 U6.12
SCK2: JP30.1 U10.12
SCK3: JP42.1 U14.12
SCK4: JP54.1 U18.12
SCK5: JP66.1 U22.12
SDI: JP7.1 U3.13
SDI1: JP19.1 U6.13
SDI2: JP31.1 U10.13
SDI3: JP43.1 U14.13
SDI4: JP55.1 U18.13
SDI5: JP67.1 U22.13
SDO: JP8.1 U3.14
SDO1: JP20.1 U6.14
SDO2: JP32.1 U10.14
SDO3: JP44.1 U14.14
SDO4: JP56.1 U18.14
SDO5: JP68.1 U22.14
TXCAN: JP1.2 TP6.1 U4.1
TXCAN1: JP13.2 TP12.1 U8.1
TXCAN2: JP25.2 TP18.1 U12.1
TXCAN3: JP37.2 TP24.1 U16.1
TXCAN4: JP49.2 TP30.1 U20.1
TXCAN5: JP61.2 TP36.1 U24.1
UC_RXCAN: JP2.1 TP3.1 U3.15
UC_RXCAN1: JP14.1 TP9.1 U6.15
UC_RXCAN2: JP26.1 TP15.1 U10.15
UC_RXCAN3: JP38.1 TP21.1 U14.15
UC_RXCAN4: JP50.1 TP27.1 U18.15
UC_RXCAN5: JP62.1 TP33.1 U22.15
UC_TXCAN: JP1.1 TP4.1 U3.16
UC_TXCAN1: JP13.1 TP10.1 U6.16
UC_TXCAN2: JP25.1 TP16.1 U10.16
UC_TXCAN3: JP37.1 TP22.1 U14.16
UC_TXCAN4: JP49.1 TP28.1 U18.16
UC_TXCAN5: JP61.1 TP34.1 U22.16